# Altium PCB PCB2.PcbDoc
Units mm, origin at the board's own origin, x right, y up, seen from the top; angles counter-clockwise.
Board outline 61.34 x 29.97 mm, 2 copper layers (Top Layer, Bottom Layer); 13 components, 7 nets, 37 pads, 0 vias.
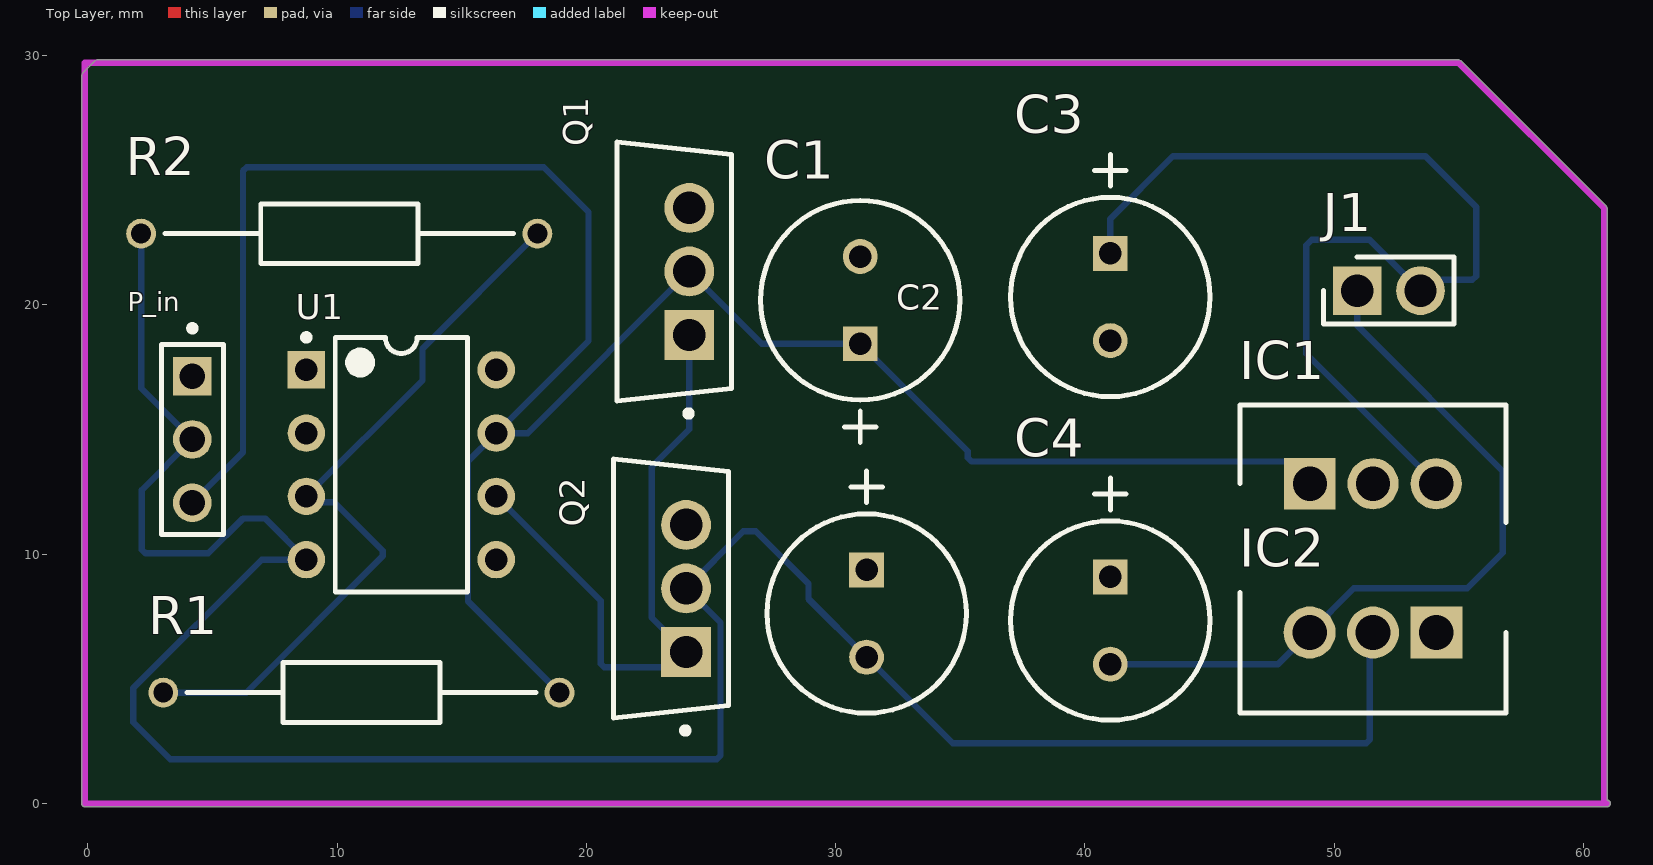
[diagram p0: Top Layer view]
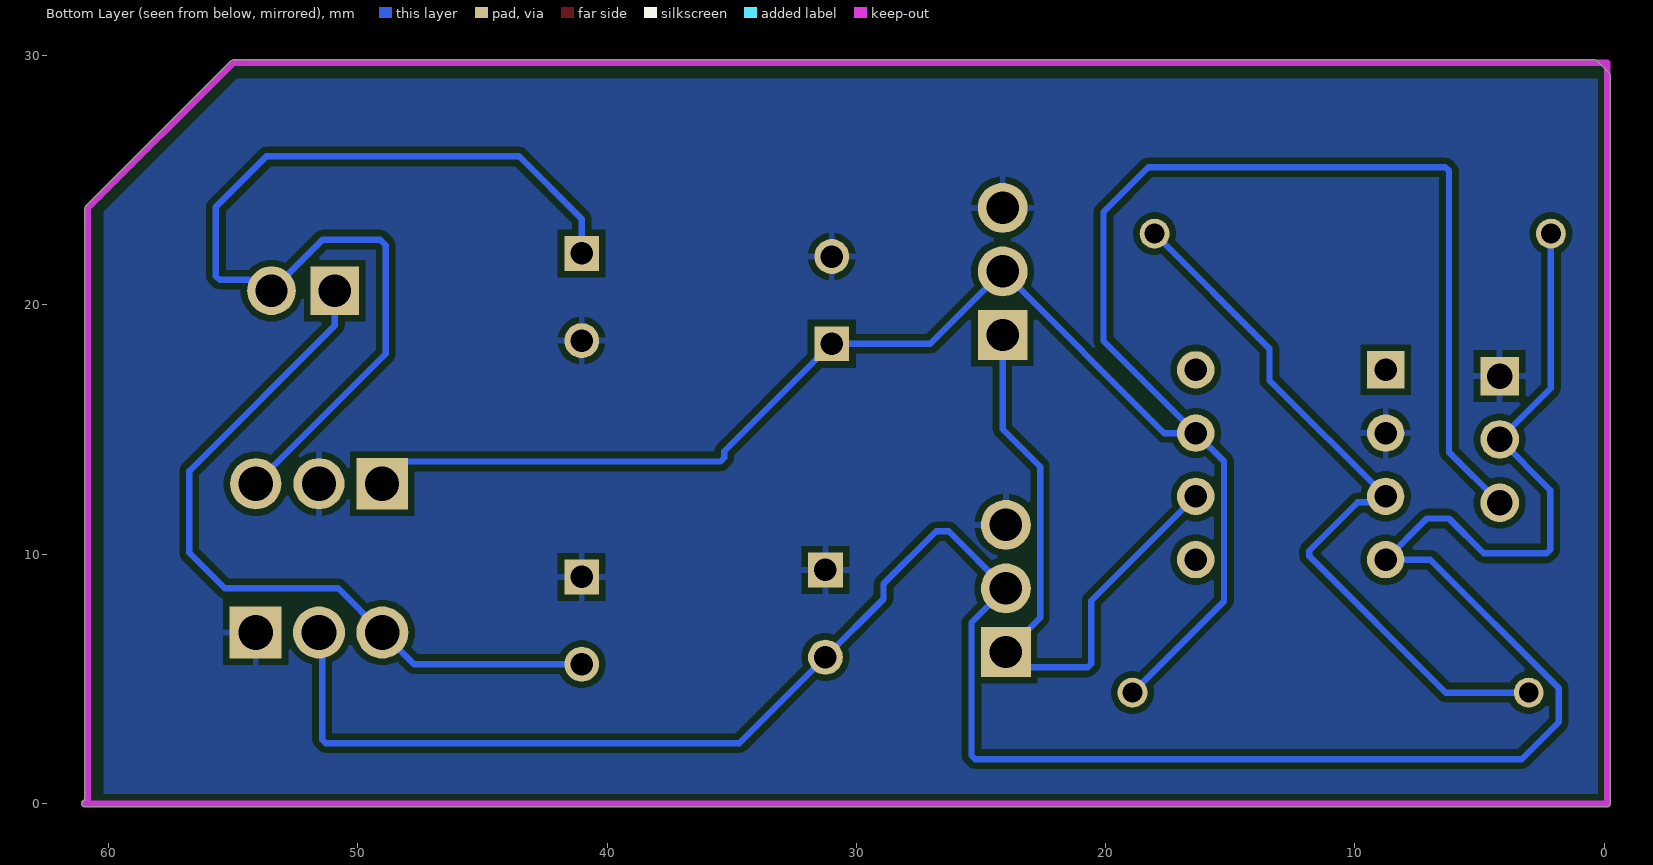
[diagram p1: Bottom Layer view, seen from below]
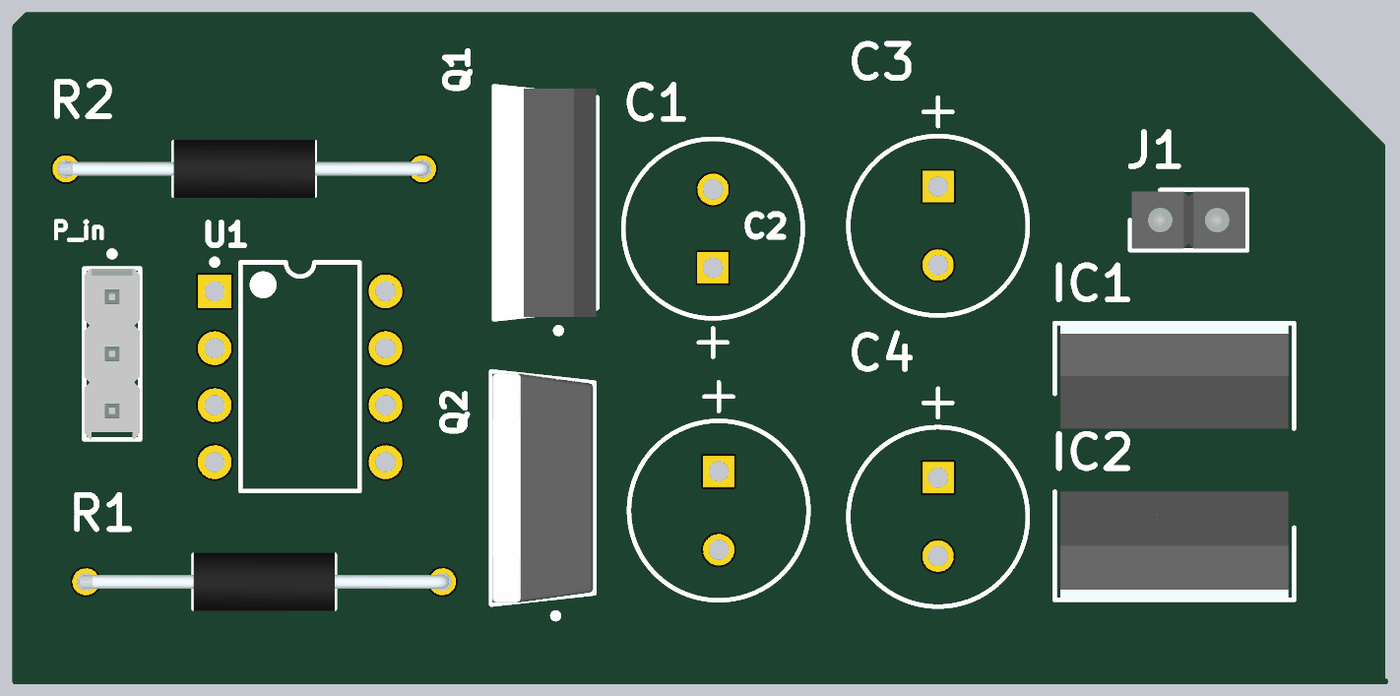
[diagram p2: 3D render of the assembled board from above, using the file's embedded part models]

## Layer stack, top to bottom
Top Solder: solder mask 0.0102, Solder Resist, Dk 3.5
Top Layer: signal copper 0.0356
Dielectric 1: dielectric 0.32, FR-4, Dk 4.8
Bottom Layer: signal copper 0.0356
Bottom Solder: solder mask 0.0102, Solder Resist, Dk 3.5

## Board outline
-0.127,-0.127 cw(c-0.127,0) -0.254,0 -0.254,29.21 -0.217,29.3 0.291,29.808 0.381,29.845 54.991,29.845 55.081,29.808 60.923,23.966 60.96,23.876 60.96,0.127 cw(c60.96,0) 61.087,0 cw(c60.96,0) 60.96,-0.127

## Design rules (kind name [scope] priority, off if disabled: settings)
Clearance [All] p1: gap=0.254 ignorepadtopadclearanceinfootprint=FALSE except(0: Arc-Hole Track-Hole SMDPad-Hole THPad-Hole Via-Hole Fill-Hole Poly-Hole Region-Hole Text-Hole)
PolygonConnect [All] p1: connectstyle=Relief reliefconductorwidth=0.254 reliefentries=4 polygonreliefangle="90 Angle" airgapwidth=0.254
RoutingVias [All] p1: holewidth=0.711 width=1.27 viastyle="Through Hole" minholewidth=0.711 minwidth=1.27 maxholewidth=0.711 maxwidth=1.27
SilkToSolderMaskClearance [IsPad] p1: minsilkscreentomaskgap=0.241 clearancetoexposedcopper=TRUE
SolderMaskExpansion [All] p1: expansion=0.089 istentingtop=FALSE
Width [All] p1: maxlimit=0.254 minlimit=0.254 preferedwidth=0.254
29 further rules are at their usual default settings.

## Components (designator, comment, footprint, x,y, rotation, side; value= is the part's Value field where it differs from the comment)
C1 "100uF" CAPPR65-350-1150X800X1250 30.988,20.193 r90 top
C2 "100uF" CAPPR65-350-1150X800X1250 31.242,7.62 r270 top
C3 "100uF" CAPPR65-350-1150X800X1250 41.021,20.32 r270 top
C4 "100uF" CAPPR65-350-1150X800X1250 41.021,7.338 r270 top
IC1 "LM7809CT" TO254P470X1016X2019-3P 49.027,12.827 r0 top
IC2 "LM7909CT" TO254P483X1016X2261-3P 54.102,6.858 r180 top
J1 "61300211121" HDRV2W110P0X254_1X2_508X254X854P 50.927,20.574 r0 top
P_in "22-28-4033" MOLX-22-28-4033_V 4.191,14.605 r270 top
Q1 "TIP31C" FP-TO-220-P0A0015988-MFG 23.523,21.346 r180 top
Q2 "TIP32C" FP-TO-220-P0A0015988-MFG 23.396,8.626 r180 top
R1 "15K" RESAD1590W60L630D240 3.023,4.445 r0 top
R2 "15K" RESAD1590W60L630D240 2.134,22.86 r0 top
U1 "TL071CP" P0008A 12.573,13.589 r0 top

## Footprints (in the part's own frame and the unit in brackets; to place one, negate y for a bottom-side part, rotate by r counter-clockwise, add the part's x,y. Pads: shape width x height; smd on the part's side, far side on the other; paste and mask are expansions set on the pad)
CAPPR65-350-1150X800X1250 [mm] "THD, 2-Leads, Dia 8mm, Body 11.5mm"
  rect 1.4x1.4 hole 0.9: 1(-1.75,0)
  round 1.4 hole 0.9: 2(1.75,0)
  silkscreen extent -5.71,-4 4,4, body extent -4,-4 4,4, height 12.5
FP-TO-220-P0A0015988-MFG [mm]
  rect 2x2 hole 1.3 paste-2539.97 mask+0: 1(-0.607,2.55)
  round 2 hole 1.3 paste-2539.97 mask+0: 2(-0.607,0) 3(-0.607,-2.55)
  silkscreen extent -2.3,-5.2 2.3,5.82, body extent -2.4,-5.3 2.4,5.3, height 0.25
HDRV2W110P0X254_1X2_508X254X854P [mm]
  rect 1.95x1.95 hole 1.3: 1(0,0)
  round 1.95 hole 1.3: 2(2.54,0)
  silkscreen extent -1.35,-1.35 3.89,1.35, body extent -1.27,-1.27 3.81,1.27, height 8.54
MOLX-22-28-4033_V [mm] "THD, 3-Leads, Body 7.62x2.49mm, Pitch 2.54mm"
  rect 1.55x1.55 hole 1.02: 1(-2.54,0)
  round 1.55 hole 1.02: 2(0,0) 3(2.54,0)
  silkscreen extent -4.58,-1.24 3.81,1.24, body extent -3.81,-1.24 3.81,1.24, height 8.38
P0008A [mm] "DIP, 8-Leads, Body 10.15x6.6mm, Pitch 2.54mm"
  rect 1.5x1.5 hole 0.9: 1(-3.81,3.81)
  round 1.5 hole 0.9: 2(-3.81,1.27) 3(-3.81,-1.27) 4(-3.81,-3.81) 5(3.81,-3.81) 6(3.81,-1.27) 7(3.81,1.27) 8(3.81,3.81)
  silkscreen extent -3.93,-5.1 2.65,5.23, body extent -3.95,-5.07 3.95,5.07, height 5.08
RESAD1590W60L630D240 [mm]
  round 1.2 hole 0.8: 1(0,0) 2(15.9,0)
  silkscreen extent 0.95,-1.2 14.95,1.2, body extent -0.3,-1.29 16.2,1.29, height 2.6
TO254P470X1016X2019-3P [mm]
  rect 2.055x2.055 hole 1.37: 1(0,0)
  round 2.055 hole 1.37: 2(2.535,0) 3(5.07,0)
  silkscreen extent -2.8,-1.55 7.87,3.15, body extent -2.55,-1.55 7.61,3.15, height 18.54
TO254P483X1016X2261-3P [mm]
  rect 2.085x2.085 hole 1.39: 1(0,0)
  round 2.085 hole 1.39: 2(2.54,0) 3(5.08,0)
  silkscreen extent -2.8,-1.61 7.88,3.22, body extent -2.54,-1.61 7.62,3.22, height 21.59

## Part data
C1 C2 C3 C4: library part CMP-1665-00042-2, "Aluminum Electrolytic Capacitor, 100 uF, +/- 20%, 50 V, -40 to 85 degC, 2-Pin THD, RoHS, Bulk", Case/Package=Radial, Dielectric Material=Aluminium, Leakage Current=3uA, Manufacturer=Panasonic, Max Operating Temperature=85degC, Min Operating Temperature=-40degC, Package Description="2-Pin Radial Lead, Dia 8 mm, Height 12.5 mm", Package Quantity=200, Package Reference=CAPPR65-350-1150X800X1250, Ripple Current=250mA, Tolerance=20%, Voltage=50V, Capacitance=100uF, Datasheet URL=https://industrial.panasonic.com/cdbs/www-data/pdf/RDF0000/ABA0000C1218.pdf, Datasheet Version="Rev. 05, 10/2016", Diameter=8mm, Dissipation Factor=0.12%, Height=11.5mm, Height - Seated (Max)=0.492inch, Lead Diameter=0.6mm, Lead Free=LeadFree, Lead Pitch=3.5mm, Lead/Base Style=Straight, Length=11.5mm, Life (Hours)=2000Hour, Manufacturer URL=http://www.panasonic.com/, Mount=ThroughHole, Number of Pins=2, Packaging=Bulk, Polarity=Polar, Radiation Hardening=No, REACH SVHC=NoSVHC, Ripple Current (AC)=250mA, RoHSCompliant=true, Termination=Radial, Voltage Rating=50V, Voltage Rating (DC)=50V
IC1: "Power Supply", Manufacturer_Name=onsemi, Mouser Part Number=512-LM7809CT, Arrow Part Number=LM7809CT, Arrow Price/Stock=https://www.arrow.com/en/products/lm7809ct/on-semiconductor?region=europe, Datasheet Link=https://mouser.componentsearchengine.com/Datasheets/2/LM7809CT.pdf, Height=4.7mm, Manufacturer_Part_Number=LM7809CT, Mouser Price/Stock=https://www.mouser.co.uk/ProductDetail/ON-Semiconductor-Fairchild/LM7809CT?qs=VOMQJJE%252BBNmmTueoZonUjQ%3D%3D
IC2: "Integrated Circuit", Manufacturer_Name=onsemi, Mouser Part Number=512-LM7909CT, Arrow Part Number=LM7909CT, Arrow Price/Stock=https://www.arrow.com/en/products/lm7909ct/on-semiconductor, Datasheet Link=https://datasheet.datasheetarchive.com/originals/distributors/Datasheets_SAMA/07f7f5cfa7b45aeaa7d93e4c14459954.pdf, Height=4.83mm, Manufacturer_Part_Number=LM7909CT, Mouser Price/Stock=https://www.mouser.co.uk/ProductDetail/ON-Semiconductor-Fairchild/LM7909CT?qs=AxPfoIcMNKJqxR53dQXLqg%3D%3D
J1: "Connector", Manufacturer_Name="Wurth Elektronik", Mouser Part Number=710-61300211121, Datasheet Link=https://componentsearchengine.com/Datasheets/2/61300211121.pdf, Height=8.54mm, Manufacturer_Part_Number=61300211121, Mouser Price/Stock=https://www.mouser.co.uk/ProductDetail/Wurth-Elektronik/61300211121?qs=t4813l51qx%252B1A5GYDQxPlw%3D%3D
P_in: library part CMP-1676-00001-5, "Male Header, Pitch 2.54 mm, 1 x 3 Position, Height 8.38 mm, Tail Length 3.18 mm, RoHS, Bulk", Colour=Black, Current Rating="4 A", Manufacturer=Molex, Max Operating Temperature="75 degC", Min Operating Temperature="0 degC", Package Quantity=1, Voltage Rating="250 V", ComponentLink1Description="Manufacturer URL", ComponentLink1URL=http://www.molex.com/, ComponentLink2Description=Datasheet, ComponentLink2URL=http://www.molex.com/pdm_docs/sd/022284033_sd.pdf, Contact Finish=Gold, Contact Material=Brass, Contact Plating=Gold, DatasheetVersion="Rev. G, 01/2012", Height="8.38 mm", Lead Pitch="0.1 inch", Length="7.62 mm", Mount="Through Hole", Mounting Technology="Through Hole", PackageDescription="Male Header, Pitch 2.54 mm, 1 x 3 Position, Height 8.38 mm, Tail Length 3.18 mm", PackageReference=22-28-4033, Packaging=Bulk, Pins=3, REACH SVHC=Unknown, RoHSCompliant=true, Rows=1
Q1: library part CMP-12195-000001-1, "TRANS NPN 100V 3A TO-220", Collector Base Voltage=100V, Collector Emitter Saturation Voltage=1.2V, Emitter Base Voltage=5V, Manufacturer=STMicroelectronics, Max Collector Current=3A, Max Junction Temp=+150°C, Package=TO-220-P0A0015988, Power Dissipation=2W, Temperature="to +150°C", Automotive=No, Category=Trans, Collector Emitter Voltage=100V, ComponentLink2Description=Datasheet, ComponentLink2URL=https://www.st.com/resource/en/datasheet/tip31c.pdf, Device Class L1="Discrete Semiconductors", Device Class L2=Transistors, Device Class L3=BJTs, Digikey Description="TRANS NPN 100V 3A TO-220", Height=19.68mm, Hfe Max=50, Hfe Min=10, Hfe Testic=3A, Hfe Testvce=4V, Lead Free=Yes, Manufacturer Part Number=TIP31C, Mouser Description="Bipolar Transistors - BJT NPN Gen Pur Power", Number Of Elements=1, Number Of Npn=1, Octopart=https://octopart.com/tip31c-stmicroelectronics-15555, RoHS=TRUE, Standoff Height=3.5mm, Temperature Range High=+150°C
Q2: library part CMP-12195-000005-1, "TRANS PNP 100V 3A TO-220", Collector Base Voltage=-100V, Collector Emitter Saturation Voltage=-1.2V, Emitter Base Voltage=-5V, Manufacturer=STMicroelectronics, Max Collector Current=-3A, Max Junction Temp=+150°C, Package=TO-220-P0A0015988, Power Dissipation=2W, Temperature="to +150°C", Automotive=No, Category=Trans, Collector Emitter Voltage=-100V, ComponentLink2Description=Datasheet, ComponentLink2URL=https://www.st.com/resource/en/datasheet/tip32c.pdf, Device Class L1="Discrete Semiconductors", Device Class L2=Transistors, Device Class L3=BJTs, Digikey Description="TRANS PNP 100V 3A TO-220", Height=19.68mm, Hfe Max=50, Hfe Min=10, Hfe Testic=-3A, Hfe Testvce=-4V, Lead Free=Yes, Manufacturer Part Number=TIP32C, Mouser Description="Original ST Microelectronics Transistor, 100V, 3A, .22 Ohm, TO-220 Package", Number Of Elements=1, Number Of Pnp=1, Octopart=https://octopart.com/tip32c-stmicroelectronics-353617, RoHS=TRUE, Standoff Height=3.5mm, Temperature Range High=+150°C
R1 R2: library part CFR-25JB-52-15K, "Resistor", Manufacturer_Name=KEMET, Mouser Part Number=603-CFR-25JB-52-15K, Datasheet Link=https://componentsearchengine.com/Datasheets/1/CFR-25JB-52-15K.pdf, Manufacturer_Part_Number=CFR-25JB-52-15K, Mouser Price/Stock=https://www.mouser.com/Search/Refine.aspx?Keyword=603-CFR-25JB-52-15K
U1: library part CMP-0017-00972-2, "Low-Noise JFET-Input General-Purpose Operational Amplifier, 7 to 36 V, 0 to 70 degC, 8-pin DIP (P8), Pb-Free (RoHS)", Manufacturer="Texas Instruments", Rating=Military, Total Supply Voltage(Max)(+5V is 5, +/-5V is 10)=36, Total Supply Voltage(Min)(+5V is 5, +/-5V is 10)=7, CMRR(Min)(dB)=70, Code_JEDEC=MS-001, ComponentLink1Description="Manufacturer URL", ComponentLink1URL=http://www.ti.com/, ComponentLink2Description=Datasheet, ComponentLink2URL=http://www.ti.com/lit/ds/symlink/tl071.pdf, ComponentLink3Description="Package Specification", ComponentLink3URL=http://www.ti.com/litv/pdf/mpdi001b, DatasheetVersion=SLOS080J, Eco-Plan="Pb-Free (RoHS)", GBW(Typ)(MHz)=3, IIB(Max)(pA)=200, Iq per channel(Max)(mA)=2.5, Mounting Technology="Through Hole", Number of Channels=1, Offset Drift(Typ)(uV/C)=18, PackageDescription="8-Pin Plastic In-Line, Body 9.59 x 6.35 mm, Pitch 2.54 mm", PackageReference=P0008A, PackageVersion="4040082/E, 04/2010", PartNumber=TL071CP, Slew Rate(Typ)(V/us)=13, Sub Family="General Purpose Amplifier, High Supply Voltage Amplifier (>=30V)", Vio (25C)(Max)(mV)=10, Vn at 1kHz(Typ)(nV/rtHz)=18

## Nets (pads, with @x,y where several pads share a name; then routed paths per layer and width w, separated by ;. In a path a pad name is that pad's centre, name@x,y a point inside that pad or via, vN(x,y) a via of type N, cw(c..) or ccw(c..) an arc to the next point about the centre after c; other vN are vias at no path point)
+12V: C1.1 IC1.1 P_in.3 Q1.2 R1.2 U1.7 | length 90.6
  Bottom Layer w0.254: P_in.3 6.223,14.097 6.223,25.378 6.372,25.527 18.288,25.527 20.088,23.727 20.088,18.564 U1.7 ; R1.2 15.252,8.116 15.252,13.728 U1.7 ; IC1.1 48.138,13.716 35.455,13.716 35.306,13.865 35.306,14.125 C1.1 27.033,18.443 Q1.2 17.643,14.859 U1.7
+Vcc: C3.1 IC1.3 J1.2 | length 40.4
  Bottom Layer w0.254: C3.1 41.021,23.45 43.534,25.963 53.666,25.963 55.698,23.931 55.698,21.159 55.549,21.01 54.362,21.01 53.926,20.574 J1.2 51.421,22.62 49.104,22.62 48.881,22.397 48.881,18.043 IC1.3
-12V: C2.2 IC2.2 P_in.2 Q2.2 R2.1 U1.4 | length 100.9
  Bottom Layer w0.254: R2.1 2.134,16.662 P_in.2 2.159,12.573 2.159,10.182 2.308,10.033 4.826,10.033 6.223,11.43 7.112,11.43 U1.4 6.97,9.779 1.82,4.629 1.82,3.26 3.302,1.778 25.235,1.778 25.384,1.927 25.384,7.245 Q2.2 26.299,10.922 26.797,10.922 28.91,8.809 28.91,8.202 C2.2 34.699,2.413 51.286,2.413 51.435,2.562 51.435,6.731 IC2.2
-Vcc: C4.2 IC2.3 J1.1 | length 30.5
  Bottom Layer w0.254: C4.2 47.752,5.588 IC2.3 50.796,8.632 55.346,8.632 56.769,10.055 56.769,13.335 50.927,19.177 J1.1
GND: C1.2 C2.1 C3.2 C4.1 IC1.2 IC2.1 P_in.1 Q1.3 Q2.3 U1.2
NetQ1_1: Q1.1 Q2.1 U1.6 | length 26.1
  Bottom Layer w0.254: U1.6 20.574,8.128 20.574,5.61 20.723,5.461 23.388,5.461 Q2.1 22.622,7.457 22.622,13.509 24.13,15.017 Q1.1
NetR1_1: R1.1 R2.2 U1.3 | length 29.6
  Bottom Layer w0.254: R1.1 6.35,4.445 11.833,9.928 11.833,10.138 9.89,12.081 9.001,12.081 U1.3 13.427,16.983 13.427,18.253 R2.2
pads on no net: U1.1 U1.5 U1.8

## Polygon pours and split planes (outlines as drawn)
GND on Bottom Layer "Ground" (solid, pour order 0): 0.127,0 0.254,-0.127 60.198,-0.127 60.198,23.749 54.864,29.083 -0.127,29.083

## Keep-outs
Keep-Out Layer:
  lines w0.254: 60.833,0.127 60.833,23.876 54.991,29.718 -0.127,29.718 -0.127,0 60.96,0